# Altium PCB 迷你打印机.PcbDoc
Units mil, origin at the board's own origin, x right, y up, seen from the top; angles counter-clockwise.
Board outline 2955 x 1380 mil, 2 copper layers (Top Layer, Bottom Layer); 64 components, 55 nets, 305 pads, 122 vias.
Unrouted connection lines stored in the file: 65.
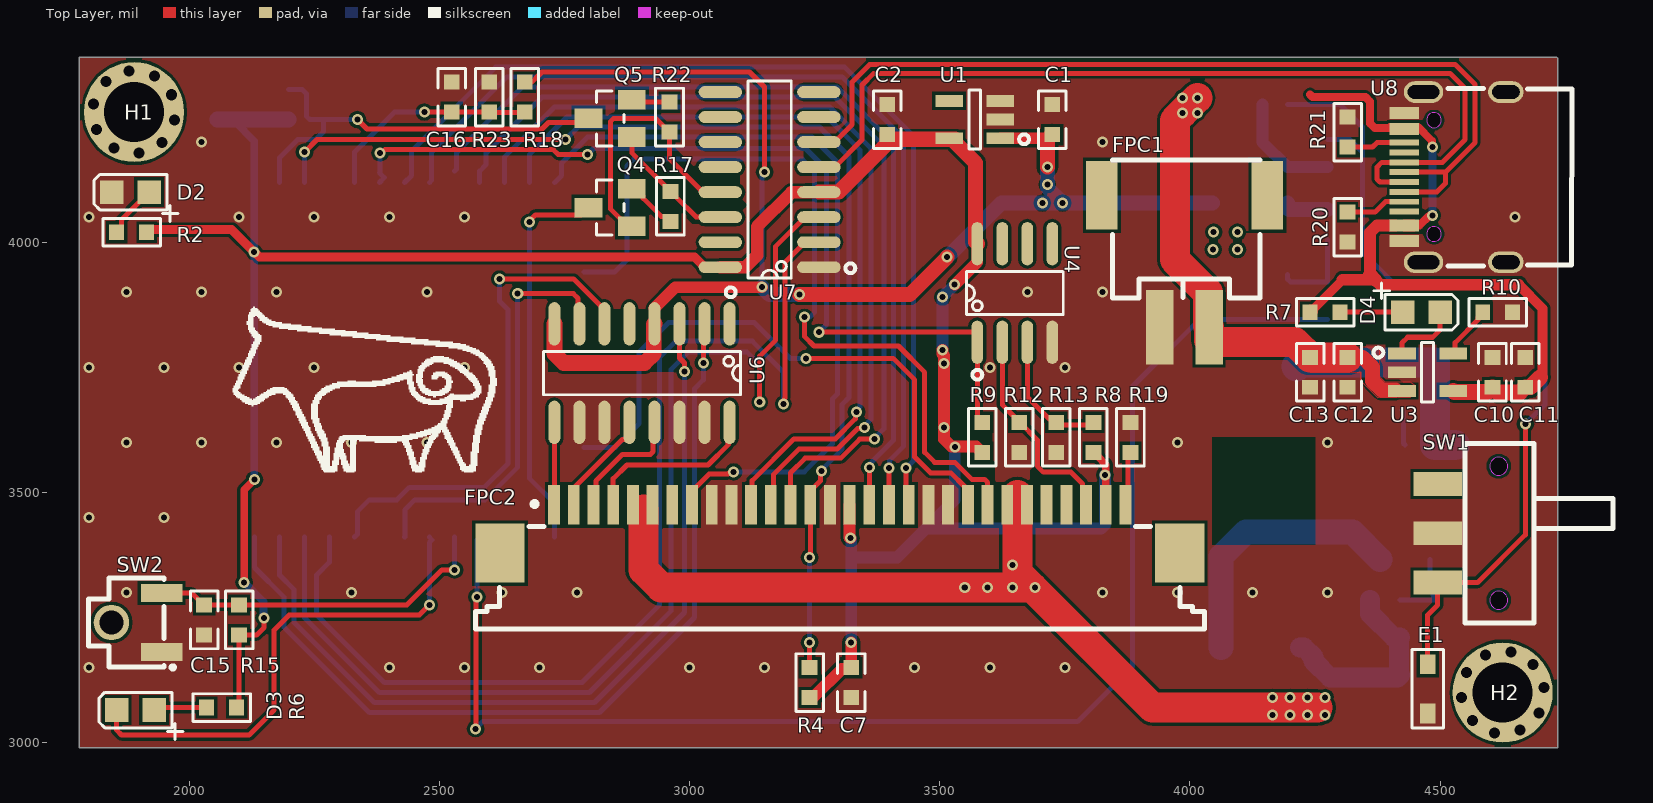
[diagram p0: Top Layer view]
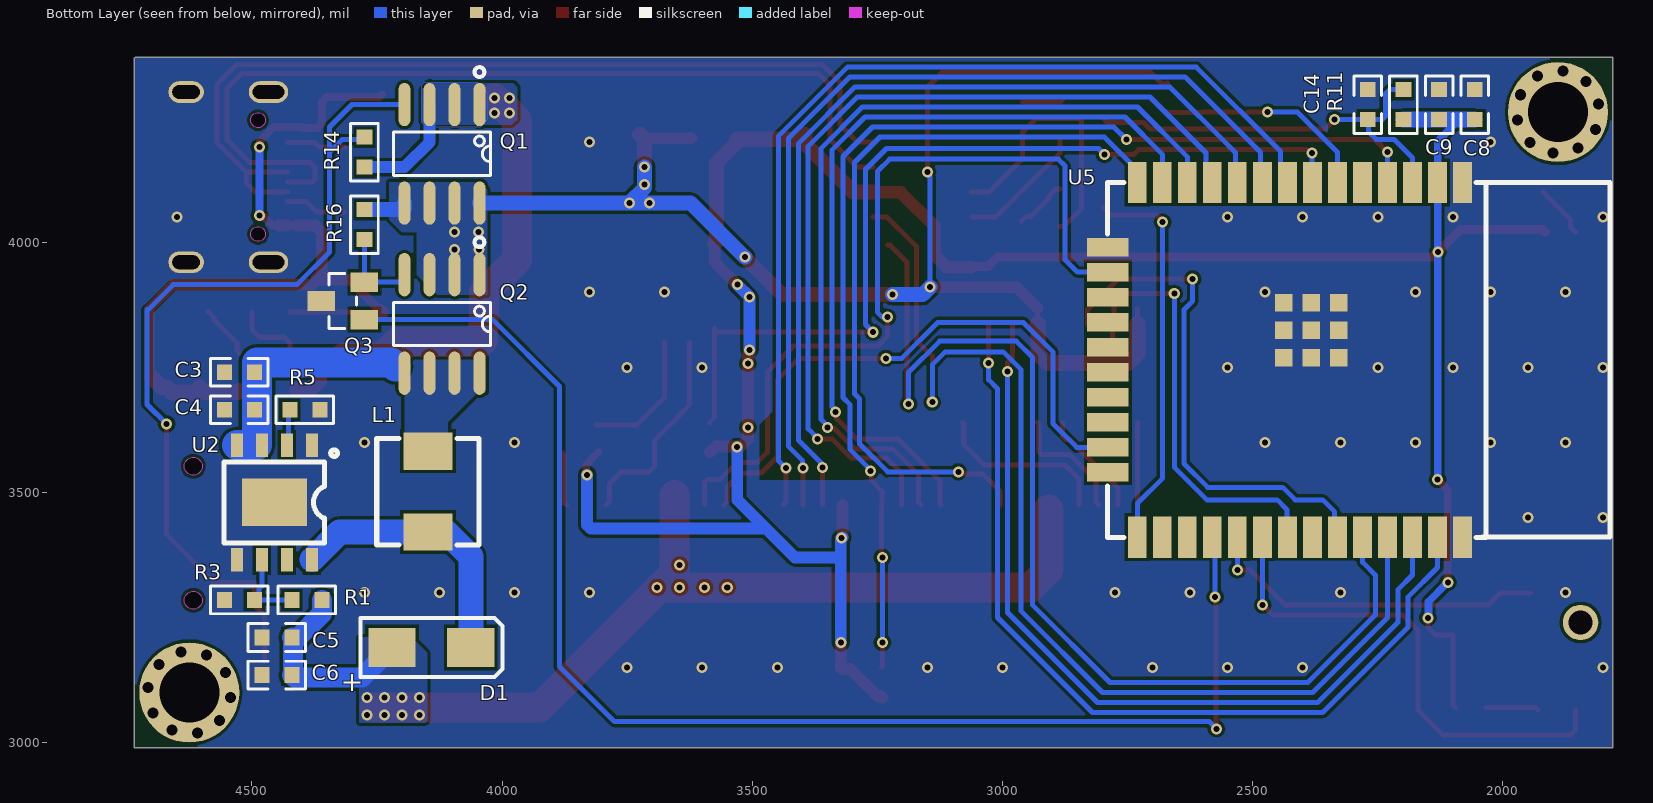
[diagram p1: Bottom Layer view, seen from below]

## Layer stack, top to bottom
Top Solder: solder mask 0.4, Solder Resist, Dk 3.5
Top Layer: signal copper 1.4
Dielectric 1: dielectric 12.6, FR-4, Dk 4.8
Bottom Layer: signal copper 1.4
Bottom Solder: solder mask 0.4, Solder Resist, Dk 3.5

## Board outline
1780,2990 1780,4370 4732.76,4370 4735,4367.76 4735,2990

## Design rules (kind name [scope] priority, off if disabled: settings)
Clearance [All] p1: gap=6 ignorepadtopadclearanceinfootprint=FALSE
PlaneClearance [All] p1: clearance=8
PlaneConnect [All] p1: planeconnectstyle=Direct reliefexpansion=20 reliefentries=4 reliefconductorwidth=10 reliefairgap=10
PolygonConnect [All] p1: connectstyle=Direct reliefconductorwidth=10 reliefentries=4 polygonreliefangle="90 Angle" airgapwidth=10
RoutingVias [All] p1: holewidth=12 width=22 viastyle="Through Hole" minholewidth=12 minwidth=22 maxholewidth=12 maxwidth=22
SilkToSilkClearance [All] p1: silktosilkclearance=5
SilkToSolderMaskClearance [IsPad] p1: minsilkscreentomaskgap=0 clearancetoexposedcopper=TRUE
SolderMaskExpansion [All] p1: expansion=4 istentingtop=FALSE
Width PWR [InNetClass('PWR')] p1: maxlimit=60 minlimit=15 preferedwidth=18
Width [InNetClass('All Nets')] p2: maxlimit=60 minlimit=10 preferedwidth=10 minimp=50.000000 maximp=50.000000 favimp=50.000000
26 further rules are at their usual default settings.

## Components (designator, comment, footprint, x,y, rotation, side; value= is the part's Value field where it differs from the comment)
C1 "1uF" 0603C 3725,4245 r90 top
C2 "1uF" 0603C 3395,4245 r90 top
C3 "47uF" 0603C 4525.08,3740 r0 bottom
C4 "100nF" 0603C 4525.08,3665 r0 bottom
C5 "47uF" 0603C 4450.08,3210 r0 bottom
C6 "100nF" 0603C 4450,3135 r0 bottom
C7 "100nF" 0603C 3323.08,3120 r270 top
C8 "22uF" 0603C 2056.14,4275 r90 bottom
C9 "0.1uF" 0603C 2127.43,4275 r90 bottom
C10 "10uF" 0603C 4604.52,3740 r90 top
C11 "0.1uF" 0603C 4670,3740 r90 top
C12 "0.1uF" 0603C 4315,3740 r270 top
C13 "10uF" 0603C 4240.08,3740 r270 top
C14 "1uF" 0603C 2270,4275 r90 bottom
C15 "100nF" 0603C 2030,3245 r270 top
C16 "100nF" 0603C 2524.92,4290 r90 top
D1 "SS54" SMA 4141.26,3190 r0 bottom
D2 "LED" 0805D 1882.6,4100 r180 top
D3 "LED" 0805D 1892.6,3065 r180 top
D4 "LED" 0805D 4462.6,3860 r0 top
E1 "单向ESD" SOD323 4475,3107.44 r90 top
FPC1 "XH-2PWB" CONN-SMD_2P-P2.50_XH-2PWB 3989.21,3961.89 r0 top
FPC2 "X10B25L30T" FPC-SMD_X10B25U30T 3300.28,3426.77 r0 top
H1 "固定孔" 铜柱孔3 1890,4260 r270 top
H2 "固定孔" 铜柱孔3 4625,3100 r0 top
L1 "4.7uH" IND-SMD_L5.4-W5.2_FXL0530 4148.06,3501.59 r270 bottom
Q1 "AO4407A" SOP8 4120,4176.57 r0 bottom
Q2 "AO4407A" SOP8 4120,3836.57 r0 bottom
Q3 "NMOS-2" SOT23-3 4318.31,3882.6 r90 bottom
Q4 "2N3904" SOT23-3 2841.5,4069.06 r90 top
Q5 "2N3904" SOT23-3 2841.5,4247.4 r90 top
R1 "11k" 0603R 4390.08,3285 r0 bottom
R2 "1k" 0603R 1885,4020 r180 top
R3 "1k" 0603R 4525.08,3285 r0 bottom
R4 "10k" 0603R 3240,3120 r270 top
R5 "33k" 0603R 4393.9,3665 r180 bottom
R6 "1k" 0603R 2065,3070 r180 top
R7 "1k" 0603R 4270,3860 r180 top
R8 "56k" 0603R 3807.11,3610 r270 top
R9 "10k" 0603R 3585,3610 r270 top
R10 "2k" 0603R 4615.08,3860 r180 top
R11 "10k" 0603R 2198.71,4275 r90 bottom
R12 "15k" 0603R 3659.03,3610 r90 top
R13 "24k" 0603R 3733.07,3610 r90 top
R14 "100k" 0603R 4275,4179.92 r90 bottom
R15 "10k" 0603R 2099.92,3245 r270 top
R16 "100k" 0603R 4275,4034.92 r270 bottom
R17 "10k" 0603R 2961.86,4071.65 r90 top
R18 "10k" 0603R 2670.79,4290 r270 top
R19 "180" 0603R 3881.14,3610 r90 top
R20 "5.1k" 0603R 4315,4030 r90 top
R21 "5.1k" 0603R 4315,4220 r270 top
R22 "10k" 0603R 2960,4250.08 r270 top
R23 "10k" 0603R 2600,4290 r90 top
SW1 "TA-3525-A1" SW-SMD_3P-L9.1-W3.5-P2.50-EH6.8 4495,3418.43 r90 top
SW2 "TS4538B3JTP 250gf 121" KEY-SMD_3P-L4.5-W3.8-P3.00-LS4.5-BL 1895,3240 r90 top
U1 "XC6210B332MR" SOT23-5 3570,4245 r90 top
U2 "AP2005SPER" ESOP-8_L4.9-W3.9-P1.27-LS6.0-BL-EP 4455,3480 r0 bottom
U3 "ME4054BM5G-N" SOT23-5 4475,3740 r270 top
U4 "LM393" SOP8 3650,3898.43 r0 top
U5 "ESP32-WROOM-32E-N8" WIFI-SMD_ESP32-WROOM-32E 2435,3765 r0 bottom
U6 "TC1508S" SOP16 2905,3738.43 r180 top
U7 "CH340C" SOP16 3160,4125 r90 top
U8 "20009-UCAF001-X" TYPE-C-SMD_20009-UCAF001-X 4530,4130 r90 top

## Footprints (in the part's own frame and the unit in brackets; to place one, negate y for a bottom-side part, rotate by r counter-clockwise, add the part's x,y. Pads: shape width x height; smd on the part's side, far side on the other; paste and mask are expansions set on the pad)
0603C [mm]
  rect 0.76x0.8 smd: 1(-0.76,0) 2(0.76,0)
  silkscreen extent -1.46,-0.7 1.46,0.7
0603R [mm]
  rect 0.76x0.8 smd: 1(-0.76,0) 2(0.76,0)
  silkscreen extent -1.46,-0.7 1.46,0.7
0805D [mm]
  rect 1.2x1.2 smd: 1(-0.95,0) 2(0.95,0)
  silkscreen extent -2.42,-0.9 1.85,1.49
CONN-SMD_2P-P2.50_XH-2PWB [mm]
  rect 1.4x3.8 smd: 1(-1.25,-3.35) 2(1.25,-3.35)
  rect 1.6x3.5 smd: 3(-4.2,3.35) 4(4.2,3.35)
  silkscreen extent -3.65,-1.87 3.82,5.14
ESOP-8_L4.9-W3.9-P1.27-LS6.0-BL-EP [mm]
  rect 0.6x1.2 smd: 1(-1.905,-2.908) 2(-0.635,-2.908) 3(0.635,-2.908) 4(1.905,-2.908) 5(1.905,2.908) 6(0.635,2.908) 7(-0.635,2.908) 8(-1.905,2.908)
  rect 3.3x2.4 smd: 9(0,0)
  silkscreen extent -3.2,-2.67 2.55,2.05
FPC-SMD_X10B25U30T [mm]
  rect 0.6x2 smd: 1(-14.5,1.225) 2(-13.5,1.225) 3(-12.5,1.225) 4(-11.5,1.225) 5(-10.5,1.225) 6(-9.5,1.225) 7(-8.5,1.225) 8(-7.5,1.225) 9(-6.5,1.225) 10(-5.5,1.225) 11(-4.5,1.225) 12(-3.5,1.225) 13(-2.5,1.225) 14(-1.5,1.225) 15(-0.5,1.225) 16(0.5,1.225) 17(1.5,1.225) 18(2.5,1.225) 19(3.5,1.225) 20(4.5,1.225) 21(5.5,1.225) 22(6.5,1.225) 23(7.5,1.225) 24(8.5,1.225) 25(9.5,1.225) 26(10.5,1.225) 27(11.5,1.225) 28(12.5,1.225) 29(13.5,1.225) 30(14.5,1.225)
  rect 2.5x3 smd: 31(17.25,-1.225) 32(-17.25,-1.225)
  silkscreen extent -18.5,-5.08 18.5,1.4
IND-SMD_L5.4-W5.2_FXL0530 [mm]
  rect 1.9x2.5 smd: 1(-2.05,0) 2(2.05,0)
  silkscreen extent -2.7,-2.6 2.7,2.6
KEY-SMD_3P-L4.5-W3.8-P3.00-LS4.5-BL [mm]
  rect 0.9x2.1 smd paste-100 mask+0.05: 1(-1.5,-1.275) 2(1.5,-1.275)
  round 1.8 hole 1.2 paste+0 mask+0.05: 3(0,1.275)
  silkscreen extent -2.36,-1.92 2.25,2.45
SMA [mm]
  rect 2.4x2 smd: 1(-2,0) 2(2,0)
  silkscreen extent -3.6,-1.5 3.6,1.5
SOD323 [mm]
  rect 1x0.8 smd: 1(-1.25,0) 2(1.25,0)
  silkscreen extent -2,-0.8 2,0.8
SOP8 [mm]
  oval 0.6x2.2 smd: 1(-1.905,-2.5) 2(-0.635,-2.5) 3(0.635,-2.5) 4(1.905,-2.5) 5(1.905,2.5) 6(0.635,2.5) 7(-0.635,2.5) 8(-1.905,2.5)
  silkscreen extent -2.46,-4.4 2.46,1.1
SOP16 [mm]
  oval 0.6x2.2 smd: 1(-4.445,-2.5) 2(-3.175,-2.5) 3(-1.905,-2.5) 4(-0.635,-2.5) 5(0.635,-2.5) 6(1.905,-2.5) 7(3.175,-2.5) 8(4.445,-2.5) 9(4.445,2.5) 10(3.175,2.5) 11(1.905,2.5) 12(0.635,2.5) 13(-0.635,2.5) 14(-1.905,2.5) 15(-3.175,2.5) 16(-4.445,2.5)
  silkscreen extent -5,-4.35 5,1.1
SOT23-3 [mm]
  rect 1x1.4 smd: 1(-0.95,-1.1) 2(0.95,-1.1) 3(0,1.1)
  silkscreen extent -1.4,-0.7 1.4,0.7
SOT23-5 [mm]
  rect 0.6x1.4 smd: 1(-0.95,-1.3) 2(0,-1.3) 3(0.95,-1.3) 4(0.95,1.3) 5(-0.95,1.3)
  silkscreen extent -1.5,-2.75 1.5,0.3
SW-SMD_3P-L9.1-W3.5-P2.50-EH6.8 [mm]
  rect 1.2x2.45 smd: 1(-2.5,0) 2(0,0) 3(2.5,0)
  Keep-Out Layer board cut-out: 3.85,-3.1 3.85,-3.011 3.781,-2.845 3.655,-2.719 3.489,-2.65 3.31,-2.65 3.145,-2.719 3.018,-2.845 2.95,-3.011 2.95,-3.1 2.95,-3.19 3.018,-3.355 3.145,-3.482 3.31,-3.55 3.489,-3.55 3.655,-3.482 3.781,-3.355 3.85,-3.19 3.85,-3.1 3.85,-3.1
  Keep-Out Layer board cut-out: -2.95,-3.1 -2.95,-3.011 -3.019,-2.845 -3.145,-2.719 -3.311,-2.65 -3.49,-2.65 -3.655,-2.719 -3.782,-2.845 -3.85,-3.011 -3.85,-3.1 -3.85,-3.19 -3.782,-3.355 -3.655,-3.482 -3.49,-3.55 -3.311,-3.55 -3.145,-3.482 -3.019,-3.355 -2.95,-3.19 -2.95,-3.1 -2.95,-3.1
  Multi-Layer pour cut-out: 3.85,-3.1 3.85,-3.011 3.781,-2.845 3.655,-2.719 3.489,-2.65 3.31,-2.65 3.145,-2.719 3.018,-2.845 2.95,-3.011 2.95,-3.1 2.95,-3.19 3.018,-3.355 3.145,-3.482 3.31,-3.55 3.489,-3.55 3.655,-3.482 3.781,-3.355 3.85,-3.19 3.85,-3.1 3.85,-3.1
  Multi-Layer pour cut-out: -2.95,-3.1 -2.95,-3.011 -3.019,-2.845 -3.145,-2.719 -3.311,-2.65 -3.49,-2.65 -3.655,-2.719 -3.782,-2.845 -3.85,-3.011 -3.85,-3.1 -3.85,-3.19 -3.782,-3.355 -3.655,-3.482 -3.49,-3.55 -3.311,-3.55 -3.145,-3.482 -3.019,-3.355 -2.95,-3.19 -2.95,-3.1 -2.95,-3.1
  silkscreen extent -4.55,-8.9 4.55,-1.4
TYPE-C-SMD_20009-UCAF001-X [mm]
  oval 1.1x2 hole 0.7 slot 1.6 at 90 deg: 1(-4.32,1.606) 2(4.32,1.606)
  oval 1.1x1.8 hole 0.7 slot 1.4 at 90 deg: 3(4.32,-2.574) 4(-4.32,-2.574)
  rect 0.3x1.5 smd paste-100 mask+0.051: A1(-3.4,2.573) A4(-2.6,2.573) A5(-1.25,2.573) A6(-0.25,2.573) A7(0.25,2.573) A8(1.25,2.574) A9(2.6,2.573) A12(3.4,2.573) B1(3.1,2.573) B4(2.3,2.573) B5(1.75,2.573) B6(0.75,2.573) B7(-0.75,2.573) B8(-1.75,2.574) B9(-2.3,2.573) B12(-3.1,2.573)
  Keep-Out Layer board cut-out: 3.265,1.076 3.265,1.151 3.208,1.289 3.102,1.394 2.965,1.451 2.815,1.451 2.677,1.394 2.572,1.289 2.515,1.151 2.515,1.076 2.515,1.001 2.572,0.864 2.677,0.758 2.815,0.701 2.965,0.701 3.102,0.758 3.208,0.864 3.265,1.001 3.265,1.076 3.265,1.076
  Keep-Out Layer board cut-out: -2.515,1.076 -2.515,1.151 -2.572,1.289 -2.678,1.394 -2.815,1.451 -2.965,1.451 -3.103,1.394 -3.208,1.289 -3.265,1.151 -3.265,1.076 -3.265,1.001 -3.208,0.864 -3.103,0.758 -2.965,0.701 -2.815,0.701 -2.678,0.758 -2.572,0.864 -2.515,1.001 -2.515,1.076 -2.515,1.076
  Multi-Layer pour cut-out: 3.265,1.076 3.265,1.151 3.208,1.289 3.102,1.394 2.965,1.451 2.815,1.451 2.677,1.394 2.572,1.289 2.515,1.151 2.515,1.076 2.515,1.001 2.572,0.864 2.677,0.758 2.815,0.701 2.965,0.701 3.102,0.758 3.208,0.864 3.265,1.001 3.265,1.076 3.265,1.076
  Multi-Layer pour cut-out: -2.515,1.076 -2.515,1.151 -2.572,1.289 -2.678,1.394 -2.815,1.451 -2.965,1.451 -3.103,1.394 -3.208,1.289 -3.265,1.151 -3.265,1.076 -3.265,1.001 -3.208,0.864 -3.103,0.758 -2.965,0.701 -2.815,0.701 -2.678,0.758 -2.572,0.864 -2.515,1.001 -2.515,1.076 -2.515,1.076
  silkscreen extent -4.5,-5.92 4.5,0.37
WIFI-SMD_ESP32-WROOM-32E [mm]
  rect 0.95x2.1 smd: 1(-9.003,-9) 2(-7.733,-9) 3(-6.463,-9) 4(-5.193,-9) 5(-3.923,-9) 6(-2.653,-9) 7(-1.383,-9) 8(-0.113,-9) 9(1.157,-9) 10(2.427,-9) 11(3.697,-9) 12(4.967,-9) 13(6.237,-9) 14(7.507,-9) 25(7.507,9) 26(6.237,9) 27(4.967,9) 28(3.697,9) 29(2.427,9) 30(1.157,9) 31(-0.113,9) 32(-1.383,9) 33(-2.653,9) 34(-3.923,9) 35(-5.193,9) 36(-6.463,9) 37(-7.733,9) 38(-9.003,9)
  rect 2.1x0.95 smd: 15(9.003,-5.715) 16(9.003,-4.445) 17(9.003,-3.175) 18(9.003,-1.905) 19(9.003,-0.635) 20(9.003,0.635) 21(9.003,1.905) 22(9.003,3.175) 23(9.003,4.445) 24(9.003,5.715)
  rect 0.9x0.9 smd: 39(-2.722,-2.9) 39(-2.722,-1.5) 39(-2.722,-0.1) 39(-1.322,-2.9) 39(-1.322,-1.5) 39(-1.322,-0.1) 39(0.078,-2.9) 39(0.078,-1.5) 39(0.078,-0.1)
  silkscreen extent -16.48,-9 9.02,9.02
铜柱孔3 [mil]
  round 23 hole 22: 11(-82.21,-9.67) 11(-72.19,40.5) 11(-60.83,-56.14) 11(-34.6,75.2) 11(-16.21,-81.17) 11(16.21,81.17) 11(34.6,-75.2) 11(60.83,56.14) 11(72.19,-40.5) 11(82.21,9.67)
  round 200 hole 120: 11(0,0)

## Part data
C1 C2 C3 C4 C5 C6 C7 C8 C9 C10 C11 C12 C13 C14 C15 C16: library part CAP, "电容"
D1 Q1 Q2: "二极管"
FPC2: LCSC Part Name="间距:1mm P数:30P 抽屉式 下接", Manufacturer="XKB Connectivity(中国星坤)", Operating Temperature Range=-40℃~+85℃, Soldering Temperature(Max)=260℃, Add into BOM=yes, Contact Material=磷青铜, Contact Plating=锡, Contact Type=下接, Convert to PCB=yes, Datasheet=https://atta.szlcsc.com/upload/public/pdf/source/20211011/C16FFC4EB876FDA360008692BDE0DBBC.pdf, Device=X10B25L30T, FFC, FCB Thickness=0.3mm, Height Above Board=2.5mm, Locking Feature=抽屉式, Manufacturer Part=X10B25L30T, Mounting Type=卧贴, Number of Contacts=30P, Pitch=1mm, Supplier=LCSC, Supplier Footprint=SMD,P=1mm,卧贴, Supplier Part=C500182, Symbol=X10B25L30T
L1: library part INDUCTOR2, "电感"
Q3: "N-Channel Power MOSFET", ComponentLink1Description="Manufacturer Link", ComponentLink1URL=http://www.irf.com/, DatasheetVersion=PD-9.814, LatestRevisionDate=17-Jul-2002, LatestRevisionNote="Re-released for DXP Platform.", Note="Pin 2 is electrically connected to pin 4.", PackageDescription="TO, Thru-Hole, Vertical, Heatsink Mounted; 3 In-Line Leads; Pitch 2.54 mm", PackageReference=TO-220AB, PackageVersion=Feb-1997, Published=8-Jun-2000, Publisher="Altium Limited"
Q4 Q5: "NPN General Purpose Amplifier", PackageDocument=Sep-1998, Code_JEDEC=TO-92A, ComponentLink1Description="Manufacturer Link", ComponentLink1URL=http://www.fairchildsemi.com/, ComponentLink2Description=Datasheet, ComponentLink2URL=http://www.fairchildsemi.com/ds/2N%2F2N3904.pdf, DatasheetDocument=1997, LatestRevisionDate=15-Jan-2003, LatestRevisionNote="PCB Footprint 'BCY-W3/D4.7' replaced", PackageReference=TO-92A, Published=8-Jun-2000, Publisher="Altium Limited"
R1 R2 R3 R4 R5 R6 R7 R8 R9 R10 R11 R12 R13 R14 R15 R16 R17 R18 R19 R20 R21 R22 R23: library part RES, "电阻"
SW1: LCSC Part Name=滑动开关9.1*3.5*2.0mm贴片侧拨单排三脚二档, Manufacturer=Yuandi(元迪), Add into BOM=yes, Convert to PCB=yes, Datasheet=https://atta.szlcsc.com/upload/public/pdf/source/20200415/C514019_BD29F4555739DB2630A1255040CB70C0.pdf, Device=TA-3525-A1, Manufacturer Part=TA-3525-A1, Name=TA-3525-A1, Supplier=LCSC, Supplier Footprint=SMD,3.5x9.1mm, Supplier Part=C514018, Symbol=TA-3525-A1
SW2: "按键", Actuator/Cap Color=黑色, Contact Current=50mA, Insulation Resistance=100MΩ, LCSC Part Name="4.5*4.5*3.8mm 立贴 轻触开关", Manufacturer="SHOU HAN(首韩)", Operating Force=250gf, Operating Temperature=-20℃~+85℃, Voltage Rating (DC)=12V, Actuator Style=圆形按钮, Add into BOM=yes, Circuit=单刀单掷, Convert to PCB=yes, Datasheet=https://atta.szlcsc.com/upload/public/pdf/source/20211019/CD02DA46ABCD6E05459BB66A2E36F770.pdf, Device="TS4538B3JTP 250gf 121", Manufacturer Part="TS4538B3JTP 250gf 121", Mechanical Life=5万次, Mounting Style=立贴, Pin Style=-, Strike Gundam=不带, Supplier=LCSC, Supplier Footprint=SMD, Supplier Part=C2906367, Switch Height=3.8mm, Switch Length=4.5mm, Switch Width=4.5mm, Symbol="TS4538B3JTP 250GF 121"
U1 U3 U6 U7: "IC"
U2: "IC", Input Voltage=2.5V~5.5V, Manufacturer=chipown(芯朋微电子), Output Current (Max)=-, Output Voltage=9V, Switching Frequency=1MHz, Add into BOM=yes, Convert to PCB=yes, Datasheet=https://atta.szlcsc.com/upload/public/pdf/source/20170918/C130340_1505703385511975250.pdf, Device=AP2005SPER, Function=升压型, LCSC Part Name=AP2005SPER, Manufacturer Part=AP2005SPER, Number of Outputs=1, Supplier=LCSC, Supplier Footprint=ESOP-8, Supplier Part=C130340, Switch tube (built-in/external)=内置, Symbol=AP2005SPER, Synchronous Rectification=否, Topology=升压式
U4: "放大器", ComponentLink1Description="Manufacturer Link", ComponentLink1URL=http://www.analog.com/, DatasheetVersion="REV. B", LatestRevisionDate=17-Jul-2002, LatestRevisionNote="Re-released for DXP Platform.", PackageDescription="Can; 8 Leads; Pin Circle Dia. 5.08 mm; Lead Dia. 0.53 mm (max)", PackageReference=H-08A, PackageVersion=1990, Published=8-Jun-2000, Publisher="Altium Limited"
U5: "IC", LCSC Part Name="通用型Wi-Fi+BT+BLE MCU模组", Manufacturer=ESPRESSIF(乐鑫), Add into BOM=yes, Convert to PCB=yes, Datasheet=https://atta.szlcsc.com/upload/public/pdf/source/20200730/C701341_95E089979D39CD8D2471FDC7C7AF29A1.pdf, Device=ESP32-WROOM-32E-N8, Manufacturer Part=ESP32-WROOM-32E-N8, Supplier=LCSC, Supplier Footprint=SMD,18x25.5mm, Supplier Part=C701342, Symbol=ESP32-WROOM-32E(8MB)
U8: "IC", Manufacturer=MINTRON(明硕), Add into BOM=yes, Convert to PCB=yes, Datasheet=https://atta.szlcsc.com/upload/public/pdf/source/20220705/4C04992B6F70FB490BC74B4779796E6C.pdf, Device=20009-UCAF001-X, LCSC Part Name=20009-UCAF001-X, Manufacturer Part=20009-UCAF001-X, Supplier=LCSC, Supplier Footprint=SMD, Supplier Part=C3148200, Symbol=20009-UCAF001-X

## Via types
v1: diameter 22, hole 12, Top Layer to Bottom Layer, tented both sides, 98 vias
v2: diameter 22, hole 12, Top Layer to Bottom Layer, 24 vias

## Nets (pads, with @x,y where several pads share a name; then routed paths per layer and width w, separated by ;. In a path a pad name is that pad's centre, name@x,y a point inside that pad or via, vN(x,y) a via of type N, cw(c..) or ccw(c..) an arc to the next point about the centre after c; other vN are vias at no path point)
BTN: C15.1 R15.1 SW2.2 U5.29 | length 690.1
  Top Layer w10: SW2.2 2005.07,3299.06 2029.21,3274.92 C15.1 2434.92,3274.92 2505,3345 v2(2530.57,3345)
  Bottom Layer w10: v2(2530.57,3345) U5.29
CLK: FPC2.22 U5.23 | length 1212.9
  Top Layer w10: v2(3232.68,3767.97) 3407.03,3767.97 3450,3725 3450,3570.86 3481.67,3539.19 3522.11,3539.19 3549.37,3511.93 3549.37,3481.81 FPC2.22
  Bottom Layer w10: U5.23 2851.74,3589.99 2899.45,3637.7 2899.45,3780.73 2958.32,3839.61 3129.47,3839.61 3201.11,3767.97 v2(3232.68,3767.97)
DI: FPC2.23 U5.16 | length 1643.7
  Top Layer w10: v2(3230,3850) 3230,3811.11 3248.67,3792.44 3417.56,3792.44 3470,3740 3470,3580 3490,3560 3530.29,3560 3564.25,3526.04 3589.69,3526.04 3595.55,3520.18 FPC2.23
  Bottom Layer w10: U5.16 2849.99,3939.99 2875,3965 2875,4152.7 2888.3,4166 3225.37,4166 3250,4141.37 3250,3860 3240,3850 v2(3230,3850)
DTR: Q4.1 R22.2 U7.13 | length 545.7
  Top Layer w10: Q4.1 2876.93,4031.66 2842.57,4066.02 2842.57,4241.54 2848.43,4247.4 2931.97,4247.4 2959.21,4220.16 R22.2 2960,4166.86 3026.86,4100 U7.13
EN: C14.1 Q5.3 R11.2 U5.3 | length 851.1
  Top Layer w10: v1(2336.35,4245.08) 2355.31,4226.12 2705.08,4226.12 2718.16,4239.2 2789.99,4239.2 Q5.3
  Bottom Layer w10: U5.3 2180.57,4168.51 2217.63,4205.57 2253.34,4205.57 2268.75,4220.98 2268.75,4243.83 C14.1 ; R11.2 2226.27,4304.92 2235,4296.19 2235,4250.94 2240.86,4245.08 C14.1 ; v1(2336.35,4245.08) C14.1
GND: C1.2 C2.2 C3.2 C4.2 C5.2 C6.2 C7.2 C8.2 C9.2 C10.2 C11.2 C12.2 C13.2 C14.2 C15.2 C16.2 D2.2 E1.1 FPC1.1 FPC2.9 FPC2.10 FPC2.15 FPC2.20 FPC2.21 Q3.3 R3.2 R5.2 R10.1 R12.1 R13.1 R19.2 R20.1 R21.1 R23.2 SW1.2 SW2.1 U1.2 U1.3 U2.1 U2.5 U2.9 U3.2 U4.4 U5.1 U5.15 U5.38 U5.39 U6.10 U6.11 U6.14 U6.15 U7.1 U8.1 U8.2 U8.3 U8.4 U8.A1 U8.A12 U8.B1 U8.B12
  other v1: 1800,3150 2400,3150 2550,3150 2700,3150 3000,3150 3150,3150 3450,3150 3600,3150 3750,3150 1875,3300 2325,3300 2625,3300 2775,3300 3825,3300 3975,3300 4125,3300 4275,3300 1800,3450 1950,3450 1875,3600 2025,3600 2175,3600 2325,3600 2475,3600 3975,3600 4275,3600 1800,3750 1950,3750 2100,3750 2250,3750 2550,3750 3600,3750 3750,3750 1875,3900 2025,3900 2175,3900 2475,3900 3675,3900 3825,3900 1800,4050 2100,4050 2250,4050 2400,4050 2550,4050 4650,4050 2025,4200 3825,4200
IN1: U5.37 U6.2 | length 1769.5
  Top Layer w10: v2(3027.66,3759.01) 3027.66,3834.51 U6.2
  Bottom Layer w10: U5.37 2130.57,3350.05 2190,3290.62 2190,3230 2360,3060 2820,3060 3010.05,3250.05 3010.05,3707.39 3027.66,3725 v2(3027.66,3759.01)
IN2: U5.36 U6.3 | length 1684.7
  Top Layer w10: U6.3 2980,3768.53 2990,3758.53 v2(2990,3741.4)
  Bottom Layer w10: U5.36 2180.57,3335 2210,3305.57 2210,3240 2370,3080 2810,3080 2990,3260 v2(2990,3741.4)
IN3: U5.33 U6.6 | length 1034.2
  Top Layer w10: v2(2620,3926.75) 2768.25,3926.75 2830,3865 U6.6
  Bottom Layer w10: U5.33 2336.15,3416.24 2336.15,3461.15 2360,3485 2415,3485 2440,3510 2590,3510 2637.36,3557.36 2637.36,3865 2620,3882.36 v2(2620,3926.75)
IN4: U5.31 U6.7 | length 866.9
  Top Layer w10: v2(2656.73,3897.18) 2767.82,3897.18 2777.39,3887.61 2777.39,3839.46 U6.7 U6.7@2780,3809.04
  Bottom Layer w10: U5.31 2430.97,3411.06 2430.97,3464.96 2451.01,3485 2591.77,3485 2656.73,3549.96 v2(2656.73,3897.18)
IO0: Q4.3 U5.25 | length 783.5
  Top Layer w10: v2@2676.43,4041.43 2678.91,4041.43 2691.86,4054.38 2783.5,4054.38 Q4.3
  Bottom Layer w10: v2(2680,4040) 2680,3528.43 2730.57,3477.86 U5.25
LAT: FPC2.8 U5.14 | length 1551.6
  Top Layer w10: FPC2.8 3005,3502.56 3038.78,3536.34 3076.46,3536.34 3078.81,3538.69 3086.02,3538.69 v2(3088.32,3540.99)
  Bottom Layer w10: U5.14 2744.27,4133.04 2744.27,4157.65 2796.62,4210 3244.77,4210 3295.57,4159.21 3295.57,3696.91 3285.31,3686.65 3285.31,3596.72 3229.58,3540.99 v2(3088.32,3540.99)
LED: D3.2 U5.30 | length 1010.6
  Top Layer w10: D3.2 1855.2,3024.8 1865,3015 2120,3015 2170,3065 2170,3225 2200,3255 2459.92,3255 2479.84,3274.92 v2(2480,3274.92)
  Bottom Layer w10: v2(2480,3274.92) 2480,3400.09 2485,3405.09 2480,3410.09 U5.30
M_A+: FPC2.3 U6.13 | length 248.1
  Top Layer w10: FPC2.3 2812.77,3479.62 2812.77,3522.77 2865.86,3575.86 2921.54,3575.86 2927.39,3581.72 2927.39,3637.39 U6.13
M_A-: FPC2.4 U6.16 | length 356.1
  Top Layer w10: FPC2.4 2847.52,3527.31 2874.94,3554.72 3036.78,3554.72 3077.39,3595.34 3077.39,3637.39 U6.16
M_B+: FPC2.1 U6.9 | length 165.2
  Top Layer w10: FPC2.1 2729.7,3475.3 2729.7,3639.7 U6.9
M_B-: FPC2.2 U6.12 | length 215.6
  Top Layer w10: FPC2.2 2768.78,3508.78 2865.9,3605.9 2873.71,3605.9 2880,3612.19 U6.12
NetD1_1: D1.1 L1.2 U2.8 | length 542.6
  Bottom Layer w50: D1.1 4062.52,3371.81 4111.59,3420.88 4324.62,3420.88 U2.8
NetD2_1: D2.1 R2.2 | length 106.9
  Top Layer w10.08: R2.2 1865,4029.92 1865,4045 D2.1
NetD3_1: D3.1 R6.2 | length 107.1
  Top Layer w10: D3.1 1935,3070 R6.2
NetD4_1: D4.1 R7.1 | length 125.3
  Top Layer w10: R7.1 D4.1
NetD4_2: D4.2 U3.1 | length 143.4
  Top Layer w10: U3.1 4423.82,3798.82 4435,3810 4485,3810 4500,3825 D4.2
NetE1_2: E1.2 Q1.4 R14.2 SW1.1 | length 1757.5
  Top Layer w10: E1.2@4475,3162.56 4475,3255 4495,3275 SW1.1 4575,3320 4670.3,3415.3 v1(4670.3,3636.63)
  Bottom Layer w10: Q1.4 4300,4275 4345,4230 4345,4179.92 ; R14.2@4275,4204.92 4320,4204.92 4345,4179.92 ; v1(4670.3,3636.63) 4709.45,3675.79 4709.45,3865 4707.15,3865 4657.15,3915 4410,3915 4345,3980 4345,4179.92
NetFPC2_30: FPC2.30 R19.1 | length 109.2
  Top Layer w10: FPC2.30 3876.06,3479.92 3876.06,3575 R19.1
NetQ2_4: Q2.4 Q3.2 R16.2 | length 176.3
  Bottom Layer w10: Q2.4 4195,3926.29 4201.29,3920 Q3.2 R16.2
NetQ4_2: Q4.2 R17.1 | length 106.3
  Top Layer w10: Q4.2 2892.68,4106.47 2907.36,4091.78 2907.36,4087.64 2943.31,4051.69 2951.9,4051.69 R17.1
NetQ5_2: Q5.2 R22.1 | length 82
  Top Layer w10: Q5.2@2880,4284.8 2884.8,4280 R22.1
NetR1_2: R1.2 R3.1 U2.6 | length 161.9
  Bottom Layer w10: R1.2 R3.1 4485.37,3294.79 4485.37,3307.13 4480,3312.5 U2.6
NetR5_1: R5.1 U2.2 | length 73.1
  Bottom Layer w10: R5.1 4426.91,3661.91 4426.91,3597.59 U2.2
NetR8_1: R8.1 R13.2 U4.3 | length 269.8
  Top Layer w10: U4.3 3675,3690.65 3729.4,3636.25 3730.65,3635 R8.1@3812.4,3635
NetR10_2: R10.2 U3.5 | length 110.4
  Top Layer w10: U3.5 4526.18,3780.39 4530,3784.21 4530,3799.14 4575.2,3844.34 4575.2,3849.25 R10.2@4588.1,3862.15
NetR20_2: R20.2 U8.A5 | length 122.3
  Top Layer w10: R20.2 4369.92,4059.92 4390.79,4080.79 U8.A5
NetR21_2: R21.2 U8.B5 | length 117.4
  Top Layer w10: R21.2 4315.08,4190 4365,4190 4373.9,4198.9 U8.B5
PHE: FPC2.28 R12.2 U4.2 | length 426.8
  Top Layer w10: U4.2 3625,3674.92 3648.29,3651.63 3648.29,3649.88 3658.25,3639.92 R12.2 ; R12.2@3659.82,3639.92 3695,3604.74 3695,3552.22 3706.97,3540.25 3762.15,3540.25 3785.59,3516.81 3785.59,3481.81 FPC2.28
PHINT: R9.1 U4.1 U5.7 | length 1827.7
  Top Layer w10: v2(2381.65,4178.35) 2384.9,4178.35 2391.55,4185 2727.86,4185 2737.48,4175.37 v1(2796.16,4175.37) ; v1(3258.43,3820) 3568.71,3820 U4.1@3575,3813.71 ; U4.1@3575,3796.05 3575,3649.88 R9.1 ; U4.1 U4.1@3575,3813.71 ; U4.1@3575,3827.81 U4.1@3575,3813.71
  Bottom Layer w10: U5.7 2390,4128.77 2380,4138.77 2381.65,4140.42 v2(2381.65,4178.35) ; v1(2796.16,4175.37) 2808.05,4187.26 3231.61,4187.26 3273.76,4145.11 3273.76,3835.33 v1(3258.43,3820)
POWER_ADC: C16.1 R18.2 R23.1 U5.6 | length 430.5
  Top Layer w10: v2(2470,4260.08) 2509.84,4260.08 C16.1@2516.99,4252.93 ; C16.1 2525.42,4260.58 2599.5,4260.58 2601.26,4258.82 2669.53,4258.82 R18.2
  Bottom Layer w10: U5.6 2330.57,4180 2410.65,4260.08 v2(2470,4260.08)
RTS: Q5.1 R17.2 U7.14 | length 261.9
  Top Layer w10: Q5.1 2884.8,4178.64 R17.2 2962.65,4101.57 2972.61,4091.61 2972.61,4090.83 3012.8,4050.64 3060.94,4050.64 U7.14
RXD0: U5.34 U7.2 | length 2154
  Top Layer w10: v2(3187.67,3676.93) 3189.97,3679.23 3189.97,3687.71 3191.03,3688.77 3191.03,3960.41 3220.12,3989.5 3224.79,3994.17 U7.2@3230.09,3994.17
  Bottom Layer w10: U5.34 2280.18,3410.28 2280.18,3360.18 2255,3335 2255,3255 2390,3120 2785,3120 2939.68,3274.68 2939.68,3769.5 2972.33,3802.16 3125.48,3802.16 3187.67,3739.96 v2(3187.67,3676.93)
STB1: FPC2.11 U5.13 | length 1621.9
  Top Layer w10: FPC2.11 3125.15,3477.04 3125.15,3523.51 3208.36,3606.72 3291.28,3606.72 3331.39,3646.82 3331.39,3658.14 v2(3333.68,3660.44)
  Bottom Layer w10: U5.13 2680.57,4175.57 2755,4250 3274.77,4250 3340.24,4184.53 3340.24,3670.25 3333.68,3663.69 v2(3333.68,3660.44)
STB2: FPC2.12 U5.12 | length 1705.3
  Top Layer w10: FPC2.12 3167.44,3479.96 3167.44,3535.27 3218.49,3586.32 3294.61,3586.32 3336,3627.7 3347.7,3627.7 v2(3350,3630)
  Bottom Layer w10: U5.12 2630.57,4170.57 2730,4270 3280,4270 3362.47,4187.53 3362.47,3645.71 3350,3633.25 v2(3350,3630)
STB3: FPC2.13 U5.11 | length 1799.4
  Top Layer w10: FPC2.13 3201.85,3539.15 3230.99,3568.3 3302.24,3568.3 3340.15,3606.2 v2(3370,3606.2)
  Bottom Layer w10: U5.11 2580.57,4141.97 2593.45,4154.85 2593.45,4178.29 2705.15,4290 3290,4290 3388.43,4191.57 3388.43,3626.92 3370,3608.5 v2(3370,3606.2)
STB4: FPC2.17 U5.10 | length 1755.4
  Top Layer w10: FPC2.17 3360,3475.67 v2(3360,3549.73)
  Bottom Layer w10: U5.10@2530.57,4141.97 2534.78,4146.18 2534.78,4179.21 2546.14,4190.57 2665.57,4310 3295,4310 3408.04,4196.96 3408.04,3604.64 3360,3556.6 v2(3360,3549.73)
STB5: FPC2.18 U5.9 | length 1862.8
  Top Layer w10: FPC2.18 v2(3398.7,3548.55)
  Bottom Layer w10: U5.9 2484,4122.77 2484,4179.21 2634.8,4330 3305,4330 3427.94,4207.06 3427.94,3592.2 3399.88,3564.14 3399.88,3549.73 v2(3398.7,3548.55)
STB6: FPC2.19 U5.8 | length 1942.9
  Top Layer w10: v2(3433.05,3548.55) 3433.05,3480.02 FPC2.19
  Bottom Layer w10: U5.8 2444.27,4133.04 2444.27,4181.38 2612.66,4349.77 3310,4349.77 3447.37,4212.4 3447.37,3562.88 v2(3433.05,3548.55)
THER: FPC2.14 R4.1 U5.4 | length 2239.5
  Top Layer w10: v2(2230.57,4180) 2255.63,4205.06 v1(2752.18,4205.06) ; v1(3240,3200) 3240,3152.11 R4.1@3242.11,3150 ; v1(3240,3370) 3242.11,3372.11 3242.11,3474.11 FPC2.14 3241.22,3502.56 3261.78,3523.12 3261.78,3540 v1(3264.07,3542.3)
  Bottom Layer w10: U5.4 v2(2230.57,4180) ; v1(2752.18,4205.06) 2777.36,4230.23 3259.77,4230.23 3318.67,4171.33 3318.67,3689.67 3305,3676 3305,3586.37 3264.07,3545.44 v1(3264.07,3542.3) ; v1@3240,3210 v1(3240,3370)
TXD0: U5.35 U7.3 | length 2218.5
  Top Layer w10: v2(3140.33,3680.13) 3140.33,3772.19 3172.24,3804.1 3172.24,3991.63 3230.62,4050 U7.3
  Bottom Layer w10: U5.35 2230.57,3249.43 2380,3100 2800,3100 2962.6,3262.6 2962.6,3745.12 2998.5,3781.01 3114.51,3781.01 3140.33,3755.19 v2(3140.33,3680.13)
UD+: U7.5 U8.A6 U8.B6 | length 1828.2
  Top Layer w10: U7.5 3289.92,4150 3344.55,4204.63 3344.55,4314.14 3367.91,4337.5 4519.66,4337.5 4550,4307.16 4550,4205 4504.53,4159.53 U8.B6 4383.43,4159.53 4373.9,4150 4373.9,4126.02 4379.76,4120.16 U8.A6
UD-: U7.6 U8.A7 U8.B7 | length 1835.1
  Top Layer w10: U7.6 3289.92,4200 3325,4235.08 3325,4320 3360,4355 4530,4355 4570,4315 4570,4199.2 4510.64,4139.84 ; U8.B7 4493.55,4100.47 4510.64,4117.56 4510.64,4139.84 ; U8.A7 4510.64,4139.84
VBAT: C12.1 C13.1 FPC1.2 Q1.1 Q1.2 Q1.3 R14.1 U3.3 | length 1187.5
  Top Layer w30: C12.1 C12.1 4345.12,3769.88 4365,3750 4365,3722.57 4382.57,3705 U3.3@4411.26,3705
  Top Layer w60: v1(4015,4288.44) v1(3985,4258.44) 3970,4243.44 3970,3965 4035.97,3899.03 4035.97,3832.47 FPC1.2 4038.42,3803.07 4040.87,3800.62 4209.38,3800.62 C13.1 C12.1
  Bottom Layer w23.62: Q1.3 4145,4200.08 4195.08,4150 R14.1
  other v1: 4015,4258.44 3985,4288.44
VBAT_OUT: C1.1 Q1.5 Q1.6 Q1.7 Q1.8 Q2.1 Q2.2 Q2.3 R16.1 R18.1 U1.1 U6.4 U6.8 | length 2869.3
  Top Layer w10: R18.1@2670,4317.83 2670,4315.67 2680.75,4315.67 2705.08,4340 3120,4340 3150,4310 v1(3150,4140) ; U6.8 U6.8@2730,3867.61 ; U6.4 U6.4@2930,3868.35
  Top Layer w23.62: U6.4@2930,3868.35 2971.65,3910 v1(3145,3910) ; U1.1 C1.1@3716.73,4207.6
  Top Layer w27.56: C1.1@3716.73,4207.6 3724.21,4215.08 C1.1@3724.29,4215.08
  Top Layer w30: v1(3220,3895) 3440,3895 v1(3515,3970) ; v1(3715,4150) 3715,4205.79 3724.29,4215.08 C1.1
  Top Layer w31.5: U6.8 2730,3776.98 2748.45,3758.53 2910.07,3758.53 2928.52,3776.98 2928.52,3835.37 U6.4
  Bottom Layer w10: v1(3145,3910) 3145,4131.75 3150,4136.75 v1(3150,4140)
  Bottom Layer w30: v1(3145,3910) 3160,3895 v1(3220,3895) ; v1(3515,3970) 3623.15,4078.15 v1(3705,4078.15) v1(3745.66,4078.15) ; v1(3715,4150) v1(3715,4115) 3715,4108.81 v1(3745.66,4078.15) ; Q1.8 v1(3745.66,4078.15) ; Q1.5 4195,4068.03 4198.19,4064.84 R16.1
  other v1: 4046.56,3985 4095,3985 4047.5,4020 4095,4020
VBUS: C10.1 C11.1 R7.2 U3.4 U8.A4 U8.A9 U8.B4 U8.B9 | length 1529.7
  Top Layer w15.75: 4240,4295 4245,4290 4350.77,4290 4360,4280.77 4360,4237.52 4369.23,4228.29 4397.52,4228.29 4399.64,4230.4 U8.A9@4426.72,4230.4 ; U8.A9@4430.65,4230.4 4455.73,4230.4 4483.5,4202.63 4483.5,4191.2 v1(4484.7,4190) ; U8.B9@4446.3,4033.55 4458.7,4033.55 4477.57,4052.42 4483.5,4052.42 v1(4484.7,4053.61)
  Top Layer w18: R7.2@4242.05,3861.97 4305.08,3925
  Top Layer w20: 4657.15,3915 4704.51,3867.65 4704.51,3734.51 4700,3730
  Top Layer w23.62: 4305.08,3925 4360,3925 4370,3925 4380,3915 4657.15,3915 ; 4360,3935 4360,4019.71 4373.84,4033.55 U8.B9@4410.98,4033.55 ; U8.B9@4428.69,4033.55 U8.B9@4446.3,4033.55
  Top Layer w27.56: R7.2 4240.08,3860.79 4241.26,3861.97 R7.2@4242.05,3861.97 ; 4360,3935 4370,3925
  Top Layer w31.5: U3.4 4528.3,3700.48 4594.93,3700.48 C10.1 4614.94,3699.66 4659.58,3699.66 C11.1 4680.08,3710.08 4700,3730
  Bottom Layer w15.75: v1@4481.98,4050 4484.7,4052.71 v1(4484.7,4053.61) v1(4484.7,4190)
VCC3.3: C2.1 C7.1 C8.1 C9.1 FPC2.16 FPC2.29 R2.1 R4.2 R6.1 R8.2 R9.2 R11.1 R15.2 U1.5 U4.8 U5.2 U7.4 U7.16 | length 5298.1
  Top Layer w10: R6.1 2099.92,3075 R15.2 2135.08,3215.08 2150,3230 v1(2150,3249.43)
  Top Layer w15: v1(2110,3320) 2110,3505 v2(2130.57,3525.57) ; R8.2 R8.2@3807.89,3580.08 ; R8.2@3815.35,3572.62 3815.35,3571.83 3831.77,3555.41 FPC2.29
  Top Layer w18: R2.1 1919.92,4025 2085,4025 v2(2130,3980) 2131.08,3980 2141.08,3970 3010.08,3970 3028.24,3951.84 3059.74,3951.84 U7.16
  Top Layer w23.62: R4.2 3243.15,3093.23 3250.36,3093.23 3303.9,3146.77 3319.93,3146.77 C7.1 v1(3323.08,3200) ; FPC2.16 3319.96,3410.04 v1(3321.54,3408.46) ; v1(3505.43,3785) 3505.43,3776.76 3508.8,3773.4 v1(3508.8,3630) 3508.8,3606.2 3523.6,3591.4 3530.04,3591.4 3572.9,3591.4 3581.06,3583.23 3581.85,3583.23 R9.2 ; v1(3530,3915) 3575,3960 U4.8
  Top Layer w25: U7.16 3111.45,3950 3135.73,3974.27 3135,3975 3135,4031 3203.31,4099.31 3232.78,4099.31 3233.46,4100 U7.4
  Top Layer w30: U7.4 3298.2,4100 3394.25,4196.05 3394.25,4215.04 3394.29,4215.08 C2.1 ; C2.1@3405.12,4205.67 3530.12,4205.67 3531.38,4204.41 3531.38,4198.62 3571.81,4158.19 3571.81,4000.04 U4.8
  Bottom Layer w15: 2091.78,4245.08 2091.78,4240.6 2130.57,4201.81 U5.2 v2(2130.57,3525.57) ; v1(2110,3320) 2148.66,3281.34 2148.66,3250.77 v1(2150,3249.43) ; C9.1 C9.1@2130.57,4241.94
  Bottom Layer w23.62: v1@3320,3410 3323.08,3406.92 3323.08,3370 ; v1(3323.08,3200) 3323.08,3370 ; v1(3505.43,3785) v1(3505.43,3890.43) v1(3530,3915) ; v1(3530.04,3590.93) 3530.04,3485.04 3472.5,3427.5 ; v1(3830,3535) 3830,3435 3822.5,3427.5 3472.5,3427.5 ; 3323.08,3370 3415,3370 3472.5,3427.5
  Bottom Layer w31.5: C8.1 2091.78,4245.08 C9.1 ; C9.1 R11.1
  other v1: 3508.87,3757.71
VCC_IN: C3.1 C4.1 L1.1 Q2.5 Q2.6 Q2.7 Q2.8 U2.3 U2.4 | length 485.9
  Bottom Layer w60: 4213.19,3751.46 4221.73,3760 4490,3760 4490,3709.92 4490,3594.5 U2.4
VH: C5.1 C6.1 D1.2 FPC2.5 FPC2.6 FPC2.24 FPC2.25 R1.1 | length 2194.2
  Top Layer w60: 2908.07,3465.63 2908.07,3345.15 2943.22,3310 3655,3310 v1@3685,3310 ; 3655,3495 3655,3340 v1@3685,3310 ; 4255,3070 3925,3070 v1@3685,3310
  Bottom Layer w40: D1.2 4227.87,3190 4247.24,3170.63 4247.24,3162.76 4280,3130 4415.08,3130 C6.1 4418.25,3136.83 4418.25,3208.09 C5.1 4407.6,3210 4360.16,3257.44 R1.1
  other v1: 4165,3055 4200,3055 4235,3055 4270,3055 4165,3090 4200,3090 4235,3090 4270,3090 3550,3310 3595,3310 3645,3310 3690,3310 3645,3355
VH_EN: Q3.1 U5.28 | length 2755.6
  Top Layer w10: v1(2572.5,3027.5) 2573.75,3028.75 2573.75,3290 v2(2575,3291.25)
  Bottom Layer w10: v1(2572.5,3027.5) 2587.08,3042.08 3775.59,3042.08 3885.32,3151.8 3885.32,3711.62 4018.89,3845.2 Q3.1 ; v2(2575,3291.25) 2575,3405.09 U5.28
pads on no net: FPC1.3 FPC1.4 FPC2.7 FPC2.26 FPC2.27 FPC2.31 FPC2.32 H1.11 H2.11 SW1.3 SW2.3 U1.4 U2.7 U4.5 U4.6 U4.7 U5.5 U5.17 U5.18 U5.19 U5.20 U5.21 U5.22 U5.24 U5.26 U5.27 U5.32 U6.1 U6.5 U7.7 U7.8 U7.9 U7.10 U7.11 U7.12 U7.15 U8.A8 U8.B8

## Polygon pours and split planes (outlines as drawn)
GND on Bottom Layer "NONET_L01_P-001" (solid, remove dead copper, pour order 13): 1775,4370 1780,4365 1780,2990 4735,2990 4735,4370
no net on Bottom Layer "NONET_L01_P-001" (solid, remove dead copper, pour order 6): 4220,3735
VBAT_OUT on Bottom Layer "NONET_L01_P-001" (solid, pour order 1): 4050,4125 4030,4105 4030,3895 4130,3895 4170,3935 4170,4020 4200,4020 4225,4045 4225,4120 4055,4120 4045,4110
VCC_IN on Bottom Layer "NONET_L01_P-001" (solid, pour order 5): 4048.41,3775 4033.41,3760 4033.41,3700 4048.41,3700 4108.41,3640 4108.41,3605 4118.41,3595 4177.7,3595 4194.9,3612.2 4194.9,3765.2 4033.41,3765.2
VBAT on Bottom Layer "NONET_L01_P-001" (solid, pour order 3): 3977.5,4317.5 3970,4310 3970,4244.17 3981,4235 4005,4235 4155,4235 4160,4240 4160,4305 4145,4320 4142.5,4317.5
VBAT on Bottom Layer "NONET_L01_P-001" (solid, pour order 2): 4046.56,4315 4030,4298.44 4030,4245 4045,4230 4150,4230 4160,4240 4160,4315 4155,4320 4050,4320 4045,4315
VH on Bottom Layer "NONET_L01_P-001" (solid, pour order 0): 4180,3210 4285,3210 4285,3040 4150,3040 4150,3180
GND on Top Layer "NONET_L01_P-001" (solid, pour order 8): 1780,4370 1780,2990 4732.94,2990 4734.05,2991.11 4732.76,2992.4 4732.76,4370
VBAT on Top Layer "NONET_L01_P-001" (solid, pour order 7): 4220,3790 4220,3760 4240,3740 4340,3740 4340,3723.7 4375,3688.7 4376.3,3690 4440.16,3690 4449.95,3697.43 4448.6,3715.56 4440.16,3720 4390,3720 4379.33,3730.67 4379.33,3790

## Other copper
Top Layer:
  pour cut-out: 4045,3610 4045,3395 4250,3395 4250,3610
  pour cut-out: 3540,3575 3595,3520 3610,3520 3610,3560 3595,3575 3545,3575 3535,3565 3555,3545 3560,3545
  pour cut-out: 3560,3810 3560,3625 3565,3620 3605,3620 3605,3600 3590,3615 3470,3615 3470,3740 3410,3800 3280,3800 3270,3810
  pour cut-out: 4305,3905 4295,3905 4225,3835 4265,3795 4540,3795 4605,3860 4605,3895 4320,3895 4305,3910
  pour cut-out: 2716.74,3882.25 2731.56,3867.43 2961.84,3867.43 2961.84,3746.92 2968.76,3740 2716.74,3740 2716.74,3880.7 2717.01,3880.96
  pour cut-out: 3684.64,3547.93 3680.68,3543.97 3680.68,3520.68 3759.33,3520.68 3759.64,3520.37 3762.15,3522.88 3762.15,3540.25 3692.32,3540.25
  pour cut-out: 4342.56,4232.44 4346.71,4228.29 4393.17,4228.29 4393.17,4170.79 4391.5,4169.12 4336.75,4169.12 4336.75,4228.29
  pour cut-out: 3360,4245 3364.29,4245 3373.25,4236.04 3372.84,4235.63 3372.84,4204.92 3312,4144.08 3307.7,4148.38 3307.7,4156.56 3355.77,4204.63 3355.77,4249.23 3360.06,4249.23 3373.25,4236.04
  pour cut-out: 3328.34,4220.25 3289.92,4181.84 3226.93,4181.84 3226.93,4168.16 3227.31,4167.78 3292.55,4167.78 3333.34,4208.56 3333.34,4220.48 3330.41,4220.48 3328.34,4222.55
  pour cut-out: 3012.15,4135.78 3012.15,4130.58 3025.95,4116.78 3100.02,4116.78 3100.02,4133.22 3097.46,4135.78
  pour cut-out: 2905,4230 2916.97,4230 2923.15,4236.19 3012.15,4147.19 3012.15,4098.86 3092.01,4098.86 3116.69,4074.17 3105.29,4062.77 3016.53,4062.77 3016.53,4069.84 2902.06,4184.31 2907.36,4189.62 2907.36,4230.23
  pour cut-out: 3014.04,4037.68 3013.53,4037.18 3005.07,4037.18 2994.15,4048.11 2994.15,4074.17 2983.61,4074.17 2983.61,4118.22 2951,4150.83 2975.63,4150.83 3032.41,4094.05 3030.34,4091.98 3030.34,4089.05 3014.04,4089.05
  pour cut-out: 2886.95,3688.27 2913.22,3688.27 2917.16,3684.34 2916.18,3683.36 2916.18,3587.07 2891.21,3587.07 2890.32,3587.97 2890.32,3593.61 2896.78,3600.06 2896.78,3678.45
  pour cut-out: 2879.86,3543.78 2861.44,3525.37 2861.44,3522.44 2863.52,3520.37 3006.95,3520.37 3025.36,3538.78 3023.29,3540.86 3023.29,3543.78
  pour cut-out: 2879.86,3543.78 2861.44,3525.37 2861.44,3524.26 2865.33,3520.37 3006.95,3520.37 3025.36,3538.78 3023.29,3540.86 3023.29,3543.78
Bottom Layer:
  pour cut-out: 3295,3665 3295,3545 3275,3525 3485,3525 3485,3635 3445,3675 3435,3665
  pour cut-out: 2450,3495 2446.94,3491.94 2446.94,3458 2730.57,3458 2680,3508.57 2680,3541.15 2621.15,3541.15 2572.93,3492.93 2446.94,3492.93
  pour cut-out: 3240,3900 3237.68,3902.32 3237.68,4153.68 3167.81,4153.68 3145,4130.88 3145,3918.19 3216.33,3918.19 3239.52,3895
  pour cut-out: 2615,4330 2655,4290 2728.6,4290 2593.45,4154.85 2587.72,4160.57 2484,4160.57 2484,4201.34 2612.66,4330
  pour cut-out: 2415.29,4248.86 2341.79,4175.35 2341.79,4166.67 2459.47,4166.67 2515,4222.2 2515,4270.44 2411.5,4270.44 2410.65,4271.29
  pour cut-out: 2130.57,4241.94 2130.57,4160.57 2311.14,4160.57 2348.61,4198.04 2348.61,4232.82 2237.97,4232.82 2225.62,4245.18 2225.52,4245.08 2127.43,4245.08

## Silkscreen, mask and mechanical layers (free items; w line width, h text height)
Top Overlay:
  drawing of 596 lines, arcs and shapes, not listed
Mechanical 1:
  lines w10: 4732.76,4370 1780,4370 1780,2990 4735,2990 4733.09,2992.22 4733.09,4367.76 4735,4367.76

## Text inside footprints (layer, text, board x,y; h text height)
D1: Bottom Overlay "+" at 4275.91,3136.46 h40 r180